# Altium PCB SensorAddOn.PcbDoc
Units mm, origin at the board's own origin, x right, y up, seen from the top; angles counter-clockwise.
Board outline 25 x 56 mm, 2 copper layers (Top Layer, Bottom Layer), stack 1.621 mm thick; 21 components, 27 nets, 120 pads, 83 vias.
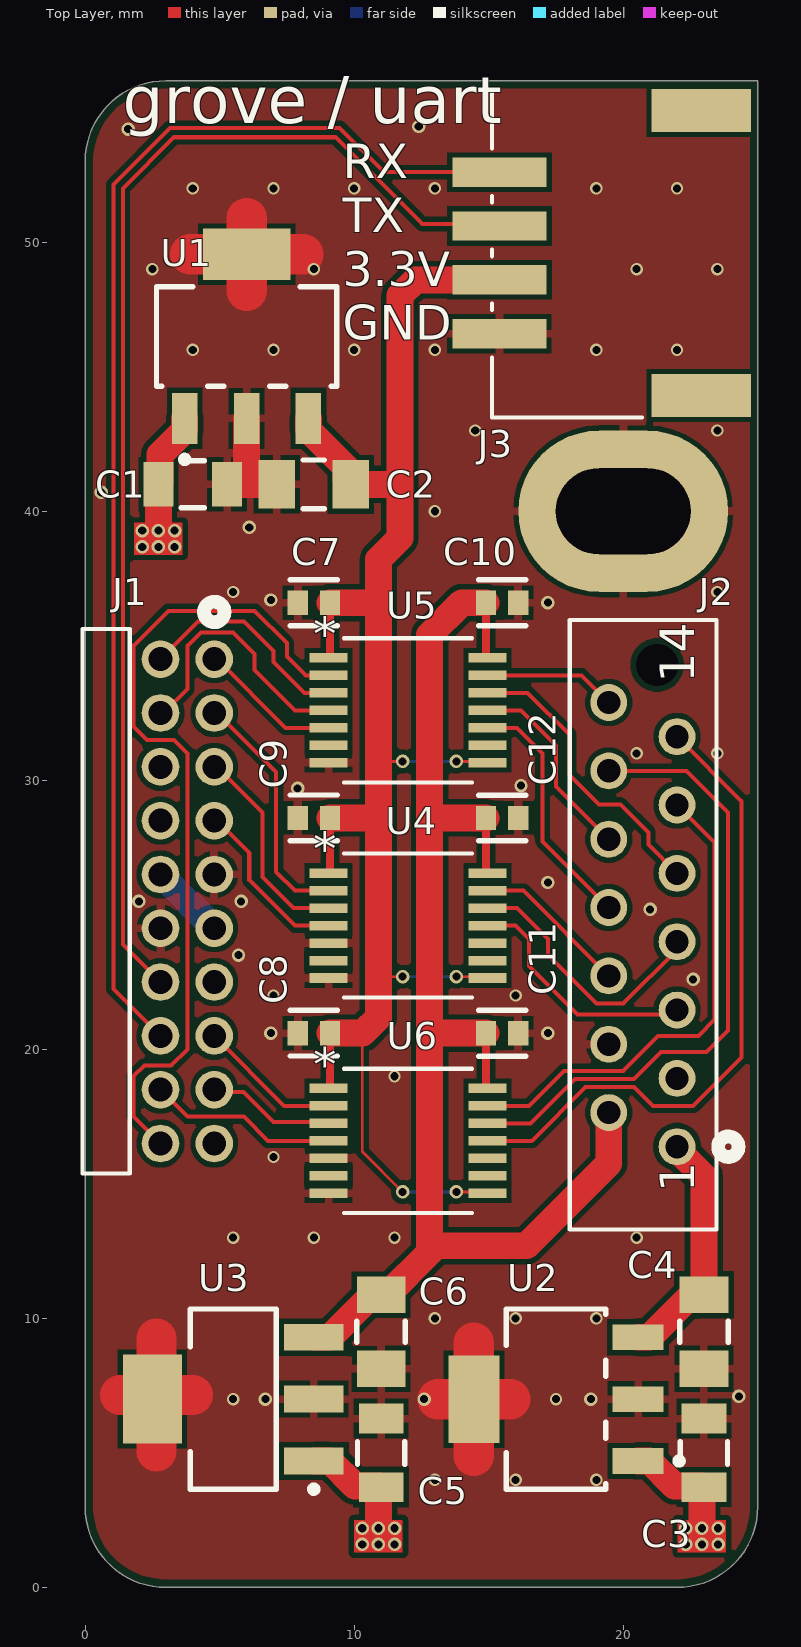
[diagram p0: Top Layer view]
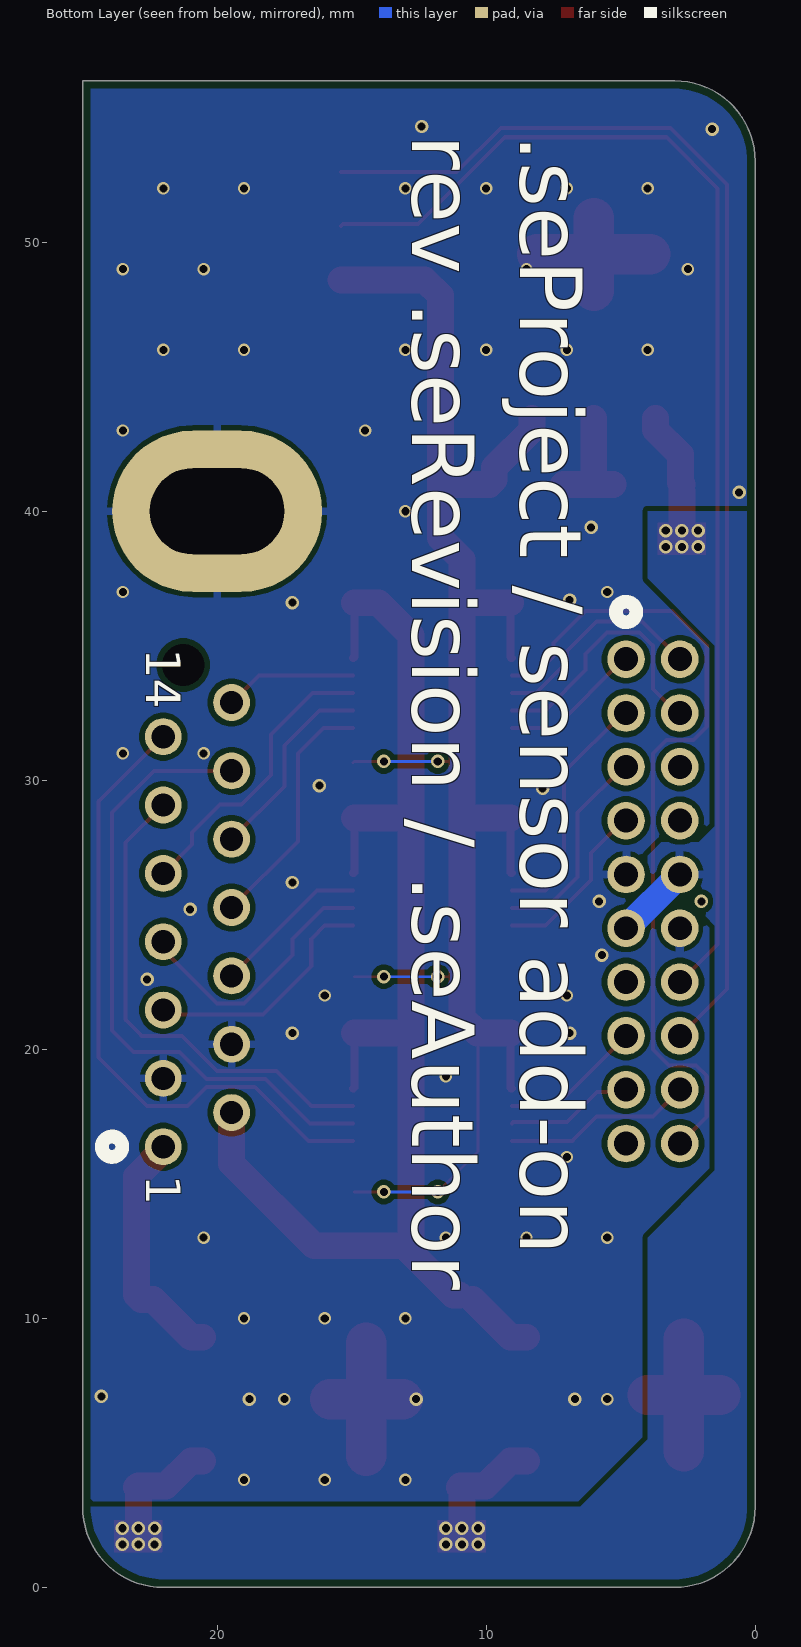
[diagram p1: Bottom Layer view, seen from below]
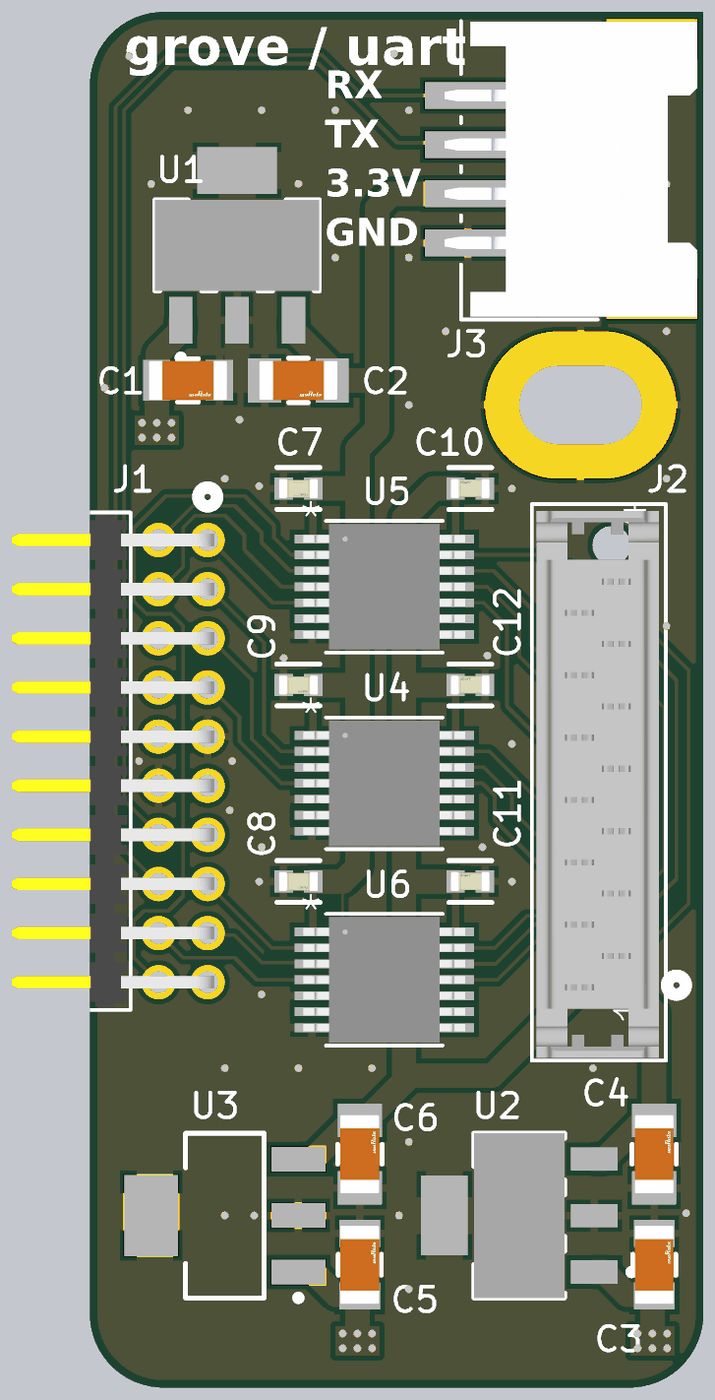
[diagram p2: 3D render of the assembled board from above, using the file's embedded part models]

## Layer stack, top to bottom
Top Solder: solder mask 0.0102, Solder Resist, Dk 3.5
Top Layer: signal copper 0.0356
Dielectric 1: dielectric 1.55, FR-4, Dk 4.8
Bottom Layer: signal copper 0.0356
Bottom Solder: solder mask 0.0102, Solder Resist, Dk 3.5

## Board outline
3,0 cw(c3,3) 0,3 0,53 cw(c3,53) 3,56 25,56 25,3 cw(c22,3) 22,0

## Design rules (kind name [scope] priority, off if disabled: settings)
BoardOutlineClearance [All] p1: gap=0.3 ignorepadtopadclearanceinfootprint=FALSE
Clearance [All] p1: gap=0.1 ignorepadtopadclearanceinfootprint=FALSE except(0.2: Arc-Poly Track-Poly SMDPad-Poly THPad-Poly Via-Poly Fill-Poly Poly-Poly)
ComponentClearance [All] p1: gap=0.35 collisioncheckmode=3 verticalgap=0.35 showdistances=FALSE
DiffPairsRouting DiffPairsRouting_ETH [InDifferentialPairClass('Ethernet')] p1: maxlimit=0.15 minlimit=0.15 mostfreqgap=0.15 toplayer_minwidth=0.132 toplayer_maxwidth=0.132 toplayer_prefwidth=0.132 bottomlayer_minwidth=0.132 bottomlayer_maxwidth=0.132 bottomlayer_prefwidth=0.132 impedanceprofiledriven=TRUE impedanceprofileid={423089D5-4439-4849-BBFB-6BD1BB4FF9E2} maxuncoupledlength=5
HoleSize [All] p1: absolutevalues=TRUE maxlimit=6.3 minlimit=0.3 maxpercent=80.000 minpercent=20.000
HoleToHoleClearance [All] p1: gap=0.3 allowstackedmicrovias=FALSE
MinimumAnnularRing [All] p1: minimumring=0.075
MinimumSolderMaskSliver [All] p1: minsoldermaskwidth=0.1
PlaneClearance [All] p1: clearance=0.3
PlaneConnect [All] p1: pad.planeconnectstyle=Relief pad.reliefexpansion=0.508 pad.reliefentries=4 pad.reliefconductorwidth=0.254 pad.reliefairgap=0.254 via.planeconnectstyle=Direct via.reliefexpansion=0.508 via.reliefentries=4 via.reliefconductorwidth=0.254 via.reliefairgap=0.254
PolygonConnect [All] p1: thpad.connectstyle=Relief thpad.reliefconductorwidth=0.3 thpad.reliefentries=4 thpad.polygonreliefangle="90 Angle" thpad.airgapwidth=0.18 smdpad.connectstyle=Relief smdpad.reliefconductorwidth=0.3 smdpad.reliefentries=4 smdpad.polygonreliefangle="90 Angle" smdpad.airgapwidth=0.18 via.connectstyle=Direct via.reliefconductorwidth=0.254 via.reliefentries=4 via.polygonreliefangle="90 Angle" via.airgapwidth=0.254
RoutingVias [All] p1: holewidth=0.3 width=0.46 viastyle="Through Hole" minholewidth=0.3 minwidth=0.45 maxholewidth=6 maxwidth=6.3
SilkToSilkClearance [All] p1: silktosilkclearance=0.15
SilkToSolderMaskClearance [IsPad] p1: minsilkscreentomaskgap=0.15 clearancetoexposedcopper=TRUE
SolderMaskExpansion [All] p1: expansion=0.05 istentingtop=FALSE
Width [All] p1: maxlimit=5 minlimit=0.1 preferedwidth=0.2 minimp=50.000000 maximp=50.000000 favimp=50.000000
21 further rules are at their usual default settings.

## Components (designator, comment, footprint, x,y, rotation, side; value= is the part's Value field where it differs from the comment)
C1 "GRM319R61C226ME15D" FP-GRM319-0_15-IPC_C 4,41 r0 top
C2 "GRM31CR71E106MA12K" FP-GRM31C-0_2-e0_3_0_8-IPC_B 8.5,41 r0 top value=10μF
C3 "GRM319R61C226ME15D" FP-GRM319-0_15-IPC_C 23,5 r90 top
C4 "GRM31CR71E106MA12K" FP-GRM31C-0_2-e0_3_0_8-IPC_B 23,9.5 r90 top value=10μF
C5 "GRM319R61C226ME15D" FP-GRM319-0_15-IPC_C 11,5 r90 top
C6 "GRM31CR71E106MA12K" FP-GRM31C-0_2-e0_3_0_8-IPC_B 11,9.5 r90 top value=10μF
C7 "C0603C104M5RACTU" FP-C0603C-CF-MFG 8.5,36.6 r180 top value="0.10 μF"
C8 "C0603C104M5RACTU" FP-C0603C-CF-MFG 8.5,20.6 r180 top value="0.10 μF"
C9 "C0603C104M5RACTU" FP-C0603C-CF-MFG 8.5,28.6 r180 top value="0.10 μF"
C10 "C0603C104M5RACTU" FP-C0603C-CF-MFG 15.5,36.6 r0 top value="0.10 μF"
C11 "C0603C104M5RACTU" FP-C0603C-CF-MFG 15.5,20.6 r0 top value="0.10 μF"
C12 "C0603C104M5RACTU" FP-C0603C-CF-MFG 15.5,28.6 r0 top value="0.10 μF"
J1 "TMM-110-01-L-D-RA" CONN_TMM-110-XX-XX-D-RA_SAI 2.8,34.5 r270 top locked
J2 "1-338068-4" CONN_1-338068-4_TYC 22,16.38 r90 top
J3 "114020164" CONN4_20164_SEE 15.4,52.6 r270 top
U1 "MCP1825ST-3302E/DB" FP-C04-032-MFG 6,46.5 r90 top
U2 "MCP1825ST-3302E/DB" FP-C04-032-MFG 17.5,7 r180 top
U3 "MCP1825ST-1802E/DB" SOT-223-DB3_N 5.5,7 r180 top
U4 "PI4ULS3V204LEX" SOIC_3V204LEX_DIO 12,24.6 r0 top
U5 "PI4ULS3V204LEX" SOIC_3V204LEX_DIO 12,32.6 r0 top
U6 "PI4ULS3V204LEX" SOIC_3V204LEX_DIO 12,16.6 r0 top

## Footprints (in the part's own frame and the unit in brackets; to place one, negate y for a bottom-side part, rotate by r counter-clockwise, add the part's x,y. Pads: shape width x height; smd on the part's side, far side on the other; paste and mask are expansions set on the pad)
CONN4_20164_SEE [mil]
  rect 43x138 smd paste+0: 1(0,0) 2(78.74,0) 3(157.48,0) 4(236.22,0)
  rect 63x145.67 smd paste-72.83: 5(-90.55,295.28) 6(326.77,295.28)
  silkscreen extent -119,-11 359,209, body extent -118,-37 354,368, height 215
CONN_1-338068-4_TYC [mil]
  round 54 / inner round 60 / far side round 54 hole 34 paste-99999 mask-27: 1(0,0) 2(50,100) 3(100,0) 4(150,100) 5(200,0) 6(250,100) 7(300,0) 8(350,100) 9(400,0) 10(450,100) 11(500,0) 12(550,100) 13(600,0) 14(650,100)
  round 59.06 hole 62 unplated paste-99999 mask-41: ""(705,29)
  silkscreen extent -121,-90 771,157, body extent -116,-47 760,150, height 157
CONN_TMM-110-XX-XX-D-RA_SAI [mil]
  round 55 / inner round 60 / far side round 55 hole 35 paste-99999 mask+0: 1(0,78.74) 2(78.74,78.74) 3(157.48,78.74) 4(236.22,78.74) 5(314.96,78.74) 6(393.7,78.74) 7(472.44,78.74) 8(551.18,78.74) 9(629.92,78.74) 10(708.66,78.74) 11(0,0) 12(78.74,0) 13(157.48,0) 14(236.22,0) 15(314.96,0) 16(393.7,0) 17(472.44,0) 18(551.18,0) 19(629.92,0) 20(708.66,0)
  silkscreen extent -84,-114 753,94, body extent -39,-235 748,88, height 156
FP-C04-032-MFG [mm]
  rect 1.9x0.95 smd paste+0 mask+0: 1(-3.05,2.3) 2(-3.05,0) 3(-3.05,-2.3)
  rect 1.9x3.25 smd paste+0 mask+0: 4(3.05,0)
  silkscreen extent -4.7,-3.35 1.85,3.35, body extent -4.1,-3.58 4.1,3.58, height 0.25
FP-C0603C-CF-MFG [mm]
  rect 0.75x0.9 smd paste+0 mask+0: 1(-0.6,0) 2(0.6,0)
  silkscreen extent -0.87,-0.85 0.88,0.85, body extent -1.2,-0.6 1.2,0.6, height 0.25
FP-GRM31C-0_2-e0_3_0_8-IPC_B [mm]
  rect 1.355x1.806 smd paste+0 mask+0: 1(-1.376,0) 2(1.376,0)
  silkscreen extent -0.4,-0.9 0.4,0.9, body extent -2.3,-1.15 2.3,1.15, height 0.25
FP-GRM319-0_15-IPC_C [mm]
  rect 1.106x1.658 smd paste+0 mask+0: 1(-1.276,0) 2(1.276,0)
  silkscreen extent -0.42,-0.87 0.42,0.87, body extent -1.93,-0.97 1.93,0.97, height 0.25
SOIC_3V204LEX_DIO [mil]
  rect 55.5x14 smd paste+0 mask+0: 1(-116.25,76.77) 2(-116.25,51.18) 3(-116.25,25.59) 4(-116.25,0) 5(-116.25,-25.59) 6(-116.25,-51.18) 7(-116.25,-76.77) 8(116.25,-76.77) 9(116.25,-51.18) 10(116.25,-25.59) 11(116.25,0) 12(116.25,25.59) 13(116.25,51.18) 14(116.25,76.77)
  silkscreen extent -94,-106 94,106, body extent -130,-101 130,101, height 47
SOT-223-DB3_N [mm] "SOT223, 4-Leads, Body 6.5x3.5mm, Pitch 2.3mm, Lead Span 7mm, IPC Medium Density"
  rect 2.2x1 smd: 1(-3,2.3) 2(-3,0) 3(-3,-2.3)
  rect 2.2x3.3 smd: 4(3,0)
  silkscreen extent -3.13,-3.35 1.6,3.47, body extent -1.85,-3.35 1.85,3.35, height 1.8

## Part data
C1 C3 C5: library part CMP-06035-037955-1, "Chip Multilayer Ceramic Capacitors for General Purpose, 1206, 22uF, X5R, 15%, 20%, 16V", Capacitance=22uF, Case Code (Imperial)=1206, Case Code (Metric)=3216, Dielectric=X5R, Max Operating Temperature=85°C, Min Operating Temperature=-55°C, Package Quantity=4000, Resistor Type=Ceramic, Tolerance=20%, Voltage Rating=16V, Case/Package=1206, Height=0.85mm, Length=0.126inch, Mount="Surface Mount", Packaging="Tape and Reel", Termination=SMD/SMT, Thickness=0.037inch, Voltage Rating (DC)=16V, Weight=0.001411oz, Width=0.063inch
C2 C4 C6: library part CMP-06035-043219-1, "Chip Multilayer Ceramic Capacitors for General Purpose, 1206, 10uF, X7R, 15%, 20%, 25V"
C7 C8 C9 C10 C11 C12: library part CMP-2006-03068-2, "CAP CER 0.1UF 50V 20% X7R 0603", Capacitance="0.10 μF", Manufacturer=KEMET, Package=C0603C-CF, Temperature="-55°C to +125°C", Temperature Characteristic=X7R, Temperature Coefficient=30ppm/°C, Temperature Range High=+125°C, Temperature Range Low=-55°C, Tolerance=0.2, Voltage Rating="50 V", Automotive=Yes, Automotive Grade="Grade 1", Category=Cap, ComponentLink2Description=Datasheet, ComponentLink2URL=https://api.kemet.com/component-edge/download/datasheet/C0603C100J5GACAUTO.pdf, Device Class L1="Passive Components", Device Class L2=Capacitors, Device Class L3="Ceramic Capacitors", Digikey Description="CAP CER 0.1UF 50V 20% X7R 0603", Height=0.87mm, Lead Free=Yes, Manufacturer Part Number=C0603C104M5RACTU, Material=Ceramic, Mouser Description="Multilayer Ceramic Capacitors MLCC - SMD/SMT 50volts 0.1uF X7R 20%", Octopart=https://octopart.com/c0603c104m5ractu-kemet-11855687, RoHS=TRUE
J1: "No Description Available", Manufacturer_Name="Samtec Inc", Supplier Part Number 1=SAM10228-ND, Copyright="Copyright (C) 2025 Ultra Librarian. All rights reserved.", Manufacturer_Part_Number=TMM-110-01-L-D-RA, RefDes=RefDes, Supplier 1=DigiKey, Supplier 2=Mouser, Supplier Part Number 2=200-TMM11001LDRA, Type=Type
J2: "MICRO-MATCH FTE,14P", Manufacturer_Name="TE Connectivity", Supplier Part Number 1=A99502CT-ND, Copyright="Copyright (C) 2025 Ultra Librarian. All rights reserved.", Datasheet=https://www.te.com/commerce/DocumentDelivery/DDEController?Action=srchrtrv&DocNm=4-1773457-1_050_Micro_MaTch&DocType=Data+Sheet&DocLang=English&PartCntxt=1-338068-4&DocFormat=pdf, Manufacturer_Part_Number=1-338068-4, RefDes=RefDes, Supplier 1=DigiKey, Supplier 2=DigiKey, Supplier 3=Mouser, Supplier Part Number 2=A99502TR-ND, Supplier Part Number 3=571-1-338068-4, Type=Type
J3: "No Description Available", Manufacturer_Name=BeagleBoard, Supplier Part Number 1=1597-114020164-ND, Copyright="Copyright (C) 2025 Ultra Librarian. All rights reserved.", Manufacturer_Part_Number=114020164, RefDes=RefDes, Supplier 1=DigiKey, Supplier 2=Mouser, Supplier Part Number 2=713-114020164, Type=Type
U1 U2: library part CMP-0136-00486-2, "IC REG LIN 3.3V 500MA SOT223-3", Case/Package=SOT-223, Dropout Voltage=210mV, Input Bias Current=120uA, Max Input Voltage=6V, Max Operating Temperature=125°C, Min Input Voltage=2.1V, Min Operating Temperature=-40°C, Output Current=500mA, Output Voltage=3.3V, Output Voltage Accuracy=0.5%, Package Quantity=4000, Quiescent Current=220uA, Mount="Surface Mount", Number of Outputs=1, Number of Pins=3, Number of Regulators=1, Output Type=Fixed, Packaging="Tape and Reel", Polarity=Positive, Radiation Hardening=No
U3: library part CMP-0136-00484-1, "500 mA, Low Voltage, Low Quiescent Current LDO Regulator, 3-Pin SOT-223, Extended Temperature, Tape and Reel", DatasheetVersion="revB, Feb-2008", PackageDescription="3-Lead Plastic Small Outline Transistor (DB) [SOT-223]", PackageReference=SOT-223-DB3, PackageVersion="revBB, Aug-2009"
U4 U5 U6: "Description", Manufacturer_Name="Diodes Inc", Supplier Part Number 1=31-PI4ULS3V204LEXCT-ND, Copyright="Copyright (C) 2025 Ultra Librarian. All rights reserved.", Manufacturer_Part_Number=PI4ULS3V204LEX, RefDes=RefDes, Supplier 1=DigiKey, Supplier 2=DigiKey, Supplier 3=DigiKey, Supplier 4=Mouser, Supplier Part Number 2=31-PI4ULS3V204LEXDKR-ND, Supplier Part Number 3=31-PI4ULS3V204LEXTR-ND, Supplier Part Number 4=729-PI4ULS3V204LEX, Type=Type

## Free pads (board coordinates)
  oval 7.8x6 hole 3.2 slot 5 at 0 deg: ""(20,40)

## Via types
v1: diameter 0.5, hole 0.3, Top Layer to Bottom Layer, tented both sides, 44 vias
v2: diameter 0.46, hole 0.3, Top Layer to Bottom Layer, tented both sides, 39 vias

## Nets (pads, with @x,y where several pads share a name; then routed paths per layer and width w, separated by ;. In a path a pad name is that pad's centre, name@x,y a point inside that pad or via, vN(x,y) a via of type N, cw(c..) or ccw(c..) an arc to the next point about the centre after c; other vN are vias at no path point)
1.8V: C6.2 C10.1 C11.1 C12.1 J2.2 U3.3 U4.14 U5.14 U6.14 | length 51
  Top Layer w0.3: C11.1 14.9,18.578 14.928,18.55 U6.14 ; C12.1 14.9,26.578 14.928,26.55 U4.14 ; C10.1 14.9,34.578 14.928,34.55 U5.14
  Top Layer w1: U3.3 9.1,9.3 C6.2@10.498,10.698 ; C6.2 11.226,10.876 12.8,12.45 ; C11.1 12.8,20.6 ; C12.1 12.8,28.6 ; C10.1 14,36.6 12.8,35.4 12.8,28.6 ; J2.2 19.46,15.76 16.4,12.7 13.05,12.7 12.8,12.45 ; 12.8,12.45 12.8,20.6 ; 12.8,20.6 12.8,28.6
3.3V: C2.2 C7.1 C8.1 C9.1 J3.3 U1.3 U4.1 U4.8 U5.1 U5.8 U6.1 U6.8 | length 65.6
  Top Layer w0.1: 10.3,20.608 10.3,16.2 v1(11.8,14.7) ; 10.9,22.7 v1(11.8,22.7) ; 10.9,30.7 v1(11.8,30.7) ; v1(13.8,14.7) U6.8@14.903,14.7 ; v1(13.8,22.7) U4.8@14.903,22.7 ; v1(13.8,30.7) 14.903,30.7 U5.8
  Top Layer w0.3: U6.1 9.072,18.55 9.1,18.578 C8.1 ; U4.1 9.072,26.55 9.1,26.578 C9.1 ; U5.1 9.072,34.55 9.1,34.578 C7.1
  Top Layer w1: U1.3 8.3,43.025 9.698,41.627 9.698,41.177 C2.2 11.7,41 ; C8.1 10.314,20.6 10.9,21.186 10.9,22.7 10.9,28.6 ; C9.1 10.9,28.6 ; C7.1 10.9,36.6 ; J3.3 12.286,48.6 11.7,48.014 11.7,41 ; 10.9,28.6 10.9,30.7 10.9,36.6 ; 10.9,36.6 10.9,38.2 11.7,39 11.7,41
  Bottom Layer w0.1: v1(11.8,14.7) v1(13.8,14.7) ; v1(11.8,22.7) v1(13.8,22.7) ; v1(11.8,30.7) v1(13.8,30.7)
5V: C1.1 C3.1 C5.1 J1.6 J1.15 U1.1 U2.1 U3.1 | length 16
  Top Layer w1: v1(2.724,39.276) C1.1@2.724,40.747 ; C1.1 2.777,41.053 2.777,42.102 3.7,43.025 U1.1 ; U3.1 9.1,4.7 10.023,3.777 10.947,3.777 C5.1 10.953,3.724 10.9,3.671 v1(10.9,2.2) ; U2.1 20.975,4.7 21.898,3.777 22.947,3.777 C3.1 ; v1(22.924,2.2) C3.1@22.924,3.671
  Bottom Layer w1: J1.15 J1.6
  other v1: 10.3,1.6 10.9,1.6 11.5,1.6 22.324,1.6 22.924,1.6 23.524,1.6 10.3,2.2 11.5,2.2 22.324,2.2 23.524,2.2 2.124,38.676 2.724,38.676 3.324,38.676 2.124,39.276 3.324,39.276
A3.3V: C4.2 J2.1 U2.3 | length 9
  Top Layer w1: U2.3 20.975,9.3 22.373,10.698 22.823,10.698 C4.2 23,15.279 22,16.279 J2.1
CS1: J2.8 U5.10 | length 9.2
  Top Layer w0.15: U5.10 16.05,31.95 17,31 17,27.73 J2.8
CS2: J2.9 U5.12 | length 11
  Top Layer w0.15: U5.12 16.45,33.25 18,31.7 18,30.2 19.1,29.1 19.9,29.1 20.933,28.067 20.933,27.607 J2.9
CS3: J2.10 U5.11 | length 7.4
  Top Layer w0.15: U5.11 16.2,32.6 17.5,31.3 17.5,29.77 J2.10
GND: C1.2 C2.1 C3.2 C4.1 C5.2 C6.1 C7.2 C8.2 C9.2 C10.2 C11.2 C12.2 J1.5 J1.16 J2.3 J2.4 J3.4 pad. U1.2 U1.4 U2.2 U2.4 U3.2 U3.4 U4.5 U4.7 U5.7 U6.5 U6.7 | length 25
  Top Layer w1: C1.2 6,41 ; U1.2 6,41 ; C2.1 6,41
  Top Layer w1.5: 1.3,7.15 U3.4@2.65,7.15 ; 2.65,5.05 U3.4@2.65,7.15 ; 2.65,9.25 U3.4@2.65,7.15 ; 3.9,49.55 U1.4 ; 4,7.15 U3.4@2.65,7.15 ; 6,48.2 U1.4 ; 6,50.9 U1.4 ; 8.1,49.55 U1.4 ; 13.1,7 U2.4 ; 14.45,4.9 U2.4 ; 14.45,9.1 U2.4 ; 15.8,7 U2.4
  other v1: 6.7,7 12.6,7 18.8,7 24.3,7.1 6.9,20.6 17.2,20.6 22.6,22.6 5.7,23.5 21,25.2 2,25.5 5.8,25.5 17.2,26.2 7.9,29.7 16.2,29.8 17.2,36.6 6.9,36.7 6.1,39.4 0.6,40.7 1.6,54.2 12.4,54.3
  other v2: 13,4 16,4 19,4 5.5,7 17.5,7 13,10 16,10 19,10 5.5,13 8.5,13 11.5,13 20.5,13 7,16 11.5,19 7,22 16,22 20.5,31 23.5,31 5.5,37 23.5,37 13,40 14.5,43 23.5,43 4,46 7,46 10,46 13,46 19,46 22,46 2.5,49 8.5,49 20.5,49 23.5,49 4,52 7,52 10,52 13,52 19,52 22,52
I\N\T\: J2.14 U5.13 | length 4.9
  Top Layer w0.15: U5.13 18.45,33.9 J2.14
MCLK: J2.5 U4.11 | length 9.1
  Top Layer w0.15: U4.11 16,24.6 16.5,24.1 16.5,23.1 18.3,21.3 21.84,21.3 J2.5
MCU_CS1: J1.1 U5.5 | length 5.2
  Top Layer w0.15: J1.1@4.9,34.5 7.45,31.95 U5.5
MCU_CS2: J1.11 U5.3 | length 8.2
  Top Layer w0.15: J1.11 4.2,35.9 5.9,35.9 7,34.8 7,34.4 8.15,33.25 U5.3
MCU_CS3: J1.12 U5.4 | length 9.9
  Top Layer w0.15: J1.12@2.9,32.5 3.8,33.4 3.8,35 4.3,35.5 5.5,35.5 6.3,34.7 6.3,34.1 7.8,32.6 U5.4
MCU_I\N\T\: J1.20 U5.2 | length 30.8
  Top Layer w0.15: J1.20 1.8,17.5 1.8,19 2.2,19.4 3.2,19.4 3.8,20 3.8,31 3.3,31.5 2.3,31.5 1.8,32 1.8,35 3.1,36.3 6.3,36.3 7.5,35.1 7.5,34.6 8.2,33.9 U5.2
MCU_MCLK: J1.4 U4.4 | length 6.3
  Top Layer w0.15: J1.4@4.9,28.5 6.1,27.3 6.1,26.3 7.8,24.6 U4.4
MCU_MISO: J1.3 U4.3 | length 7.7
  Top Layer w0.15: J1.3@4.9,30.5 6.6,28.8 6.6,26.4 7.75,25.25 U4.3
MCU_MOSI: J1.2 U4.2 | length 9
  Top Layer w0.15: J1.2@4.9,32.5 7.1,30.3 7.1,26.6 7.8,25.9 U4.2
MCU_RX: J1.18 J3.1 | length 48.3
  Top Layer w0.15: J1.18 1.05,22.25 1.05,52.145 3.155,54.25 9.45,54.25 11.1,52.6 J3.1
MCU_SYNC1: J1.8 U6.2 | length 5.3
  Top Layer w0.15: J1.8 7.4,17.9 U6.2
MCU_SYNC2: J1.9 U6.3 | length 4.7
  Top Layer w0.15: J1.9@4.9,18.5 4.982,18.418 5.882,18.418 7,17.3 8.997,17.3 U6.3
MCU_SYNC3: J1.19 U6.4 | length 7
  Top Layer w0.15: J1.19 3.8,17.5 5.9,17.5 6.8,16.6 U6.4
MCU_TX: J1.17 J3.2 | length 46.2
  Top Layer w0.15: J1.17 1.4,23.9 1.4,52 3.3,53.9 9.305,53.9 12.53,50.675 15.325,50.675 J3.2
MISO: J2.7 U4.12 | length 10
  Top Layer w0.15: U4.12 16.05,25.25 17.2,24.1 17.2,23.5 19,21.7 20,21.7 22,23.7 J2.7
MOSI: J2.6 U4.13 | length 5.8
  Top Layer w0.15: U4.13 16.29,25.9 J2.6
SYNC1: J2.11 U6.13 | length 18.3
  Top Layer w0.15: U6.13 16.5,17.9 17.8,19.2 20,19.2 21.3,20.5 22.8,20.5 23.4,21.1 23.4,27.68 J2.11
SYNC2: J2.12 U6.12 | length 23.6
  Top Layer w0.15: U6.12 16.55,17.25 18.2,18.9 20.4,18.9 21.4,19.9 23.1,19.9 23.9,20.7 23.9,28.8 22.35,30.35 J2.12
SYNC3: J2.13 U6.11 | length 24.2
  Top Layer w0.15: U6.11 16.6,16.6 18.6,18.6 20.4,18.6 21.1,17.9 22.6,17.9 24.4,19.7 24.4,29.22 J2.13
pads on no net: J1.7 J1.10 J1.13 J1.14 J2. J3.5 J3.6 U4.6 U4.9 U4.10 U5.6 U5.9 U6.6 U6.9 U6.10

## Polygon pours and split planes (outlines as drawn)
GND on Bottom Layer "GND_L02_P002" (solid, pour order 2): 25,3 6,3 0,9 0,56 25,56
5V on Bottom Layer "5V_L02_P001" (solid, pour order 1): 25,0 25,3 6.5,3 4,5.5 4,13 1.5,15.5 1.5,24.6 2.2,25.3 3.5,25.3 4,25.8 4,27.2 3.5,27.7 2.1,27.7 1.5,28.3 1.5,35 4,37.5 4,40 0,40 0,0
GND on Top Layer "GND_L01_P003" (solid, pour order 3): 25,56 25,0 0,0 0,56

## Other copper
Top Layer:
  rectangle net 5V: 1.824,38.376 3.624,39.576
  rectangle net 5V: 22.024,1.3 23.824,2.5
  rectangle net 5V: 10,1.3 11.8,2.5

## Silkscreen, mask and mechanical layers (free items; w line width, h text height)
Top Overlay:
  text "grove / uart" at 1.4,53.847 h3
  text "RX" at 9.578,51.942 h2.2
  text "TX" at 9.578,49.943 h2.2
  text "3.3V" at 9.578,47.943 h2.2
  text "GND" at 9.578,45.943 h2.2
Bottom Overlay:
  text ".seProject / sensor add-on" at 9.496,54 h4 r90
  text "rev .seRevision / .seAuthor" at 13.506,54 h4 r90
Mechanical 1:
  the board outline again, w0.1

## Text inside footprints (layer, text, board x,y; h text height)
J2: Top 3D Body "1" at 22.635,14.691 h1.27 r90; Top 3D Body "1" at 22.635,14.691 h1.27 r90; Top 3D Body "14" at 22.635,33.627 h1.27 r90; Top 3D Body "14" at 22.635,33.627 h1.27 r90; Top Overlay "1" at 22.635,14.691 h1.27 r90; Top Overlay "1" at 22.635,14.691 h1.27 r90; Top Overlay "14" at 22.635,33.627 h1.27 r90; Top Overlay "14" at 22.635,33.627 h1.27 r90; Bottom Overlay "1" at 22.635,15.326 h1.27 r90; Bottom Overlay "1" at 22.635,15.326 h1.27 r90; Bottom Overlay "14" at 22.635,34.897 h1.27 r90; Bottom Overlay "14" at 22.635,34.897 h1.27 r90
U4: Top 3D Body "*" at 9.816,25.806 h1.27; Top Overlay "*" at 8.476,26.779 h1.27
U5: Top 3D Body "*" at 9.816,33.806 h1.27; Top Overlay "*" at 8.476,34.779 h1.27
U6: Top 3D Body "*" at 9.816,17.806 h1.27; Top Overlay "*" at 8.476,18.779 h1.27